# Altium PCB AIRtest.PcbDoc
Units mm, origin at the board's own origin, x right, y up, seen from the top; angles counter-clockwise.
Board outline 53.34 x 33.02 mm, 2 copper layers (Top Layer, Bottom Layer); 42 components, 56 nets, 120 pads, 0 vias.
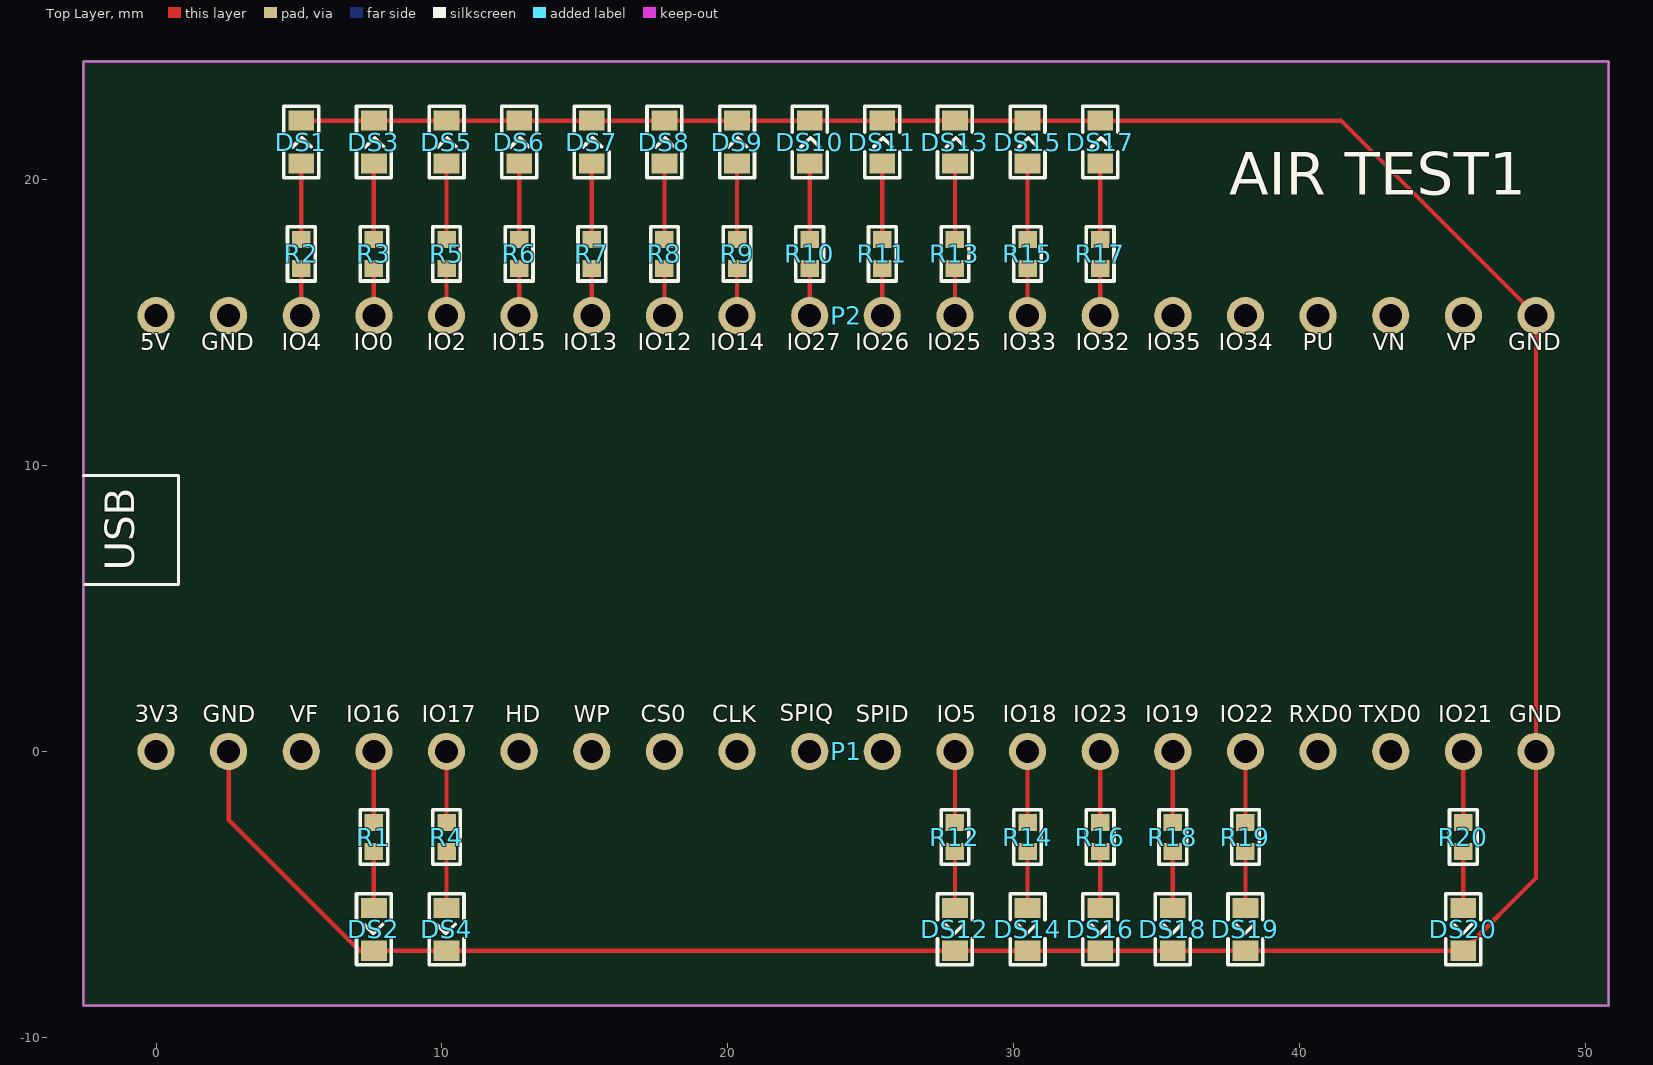
[diagram p0: Top Layer view]
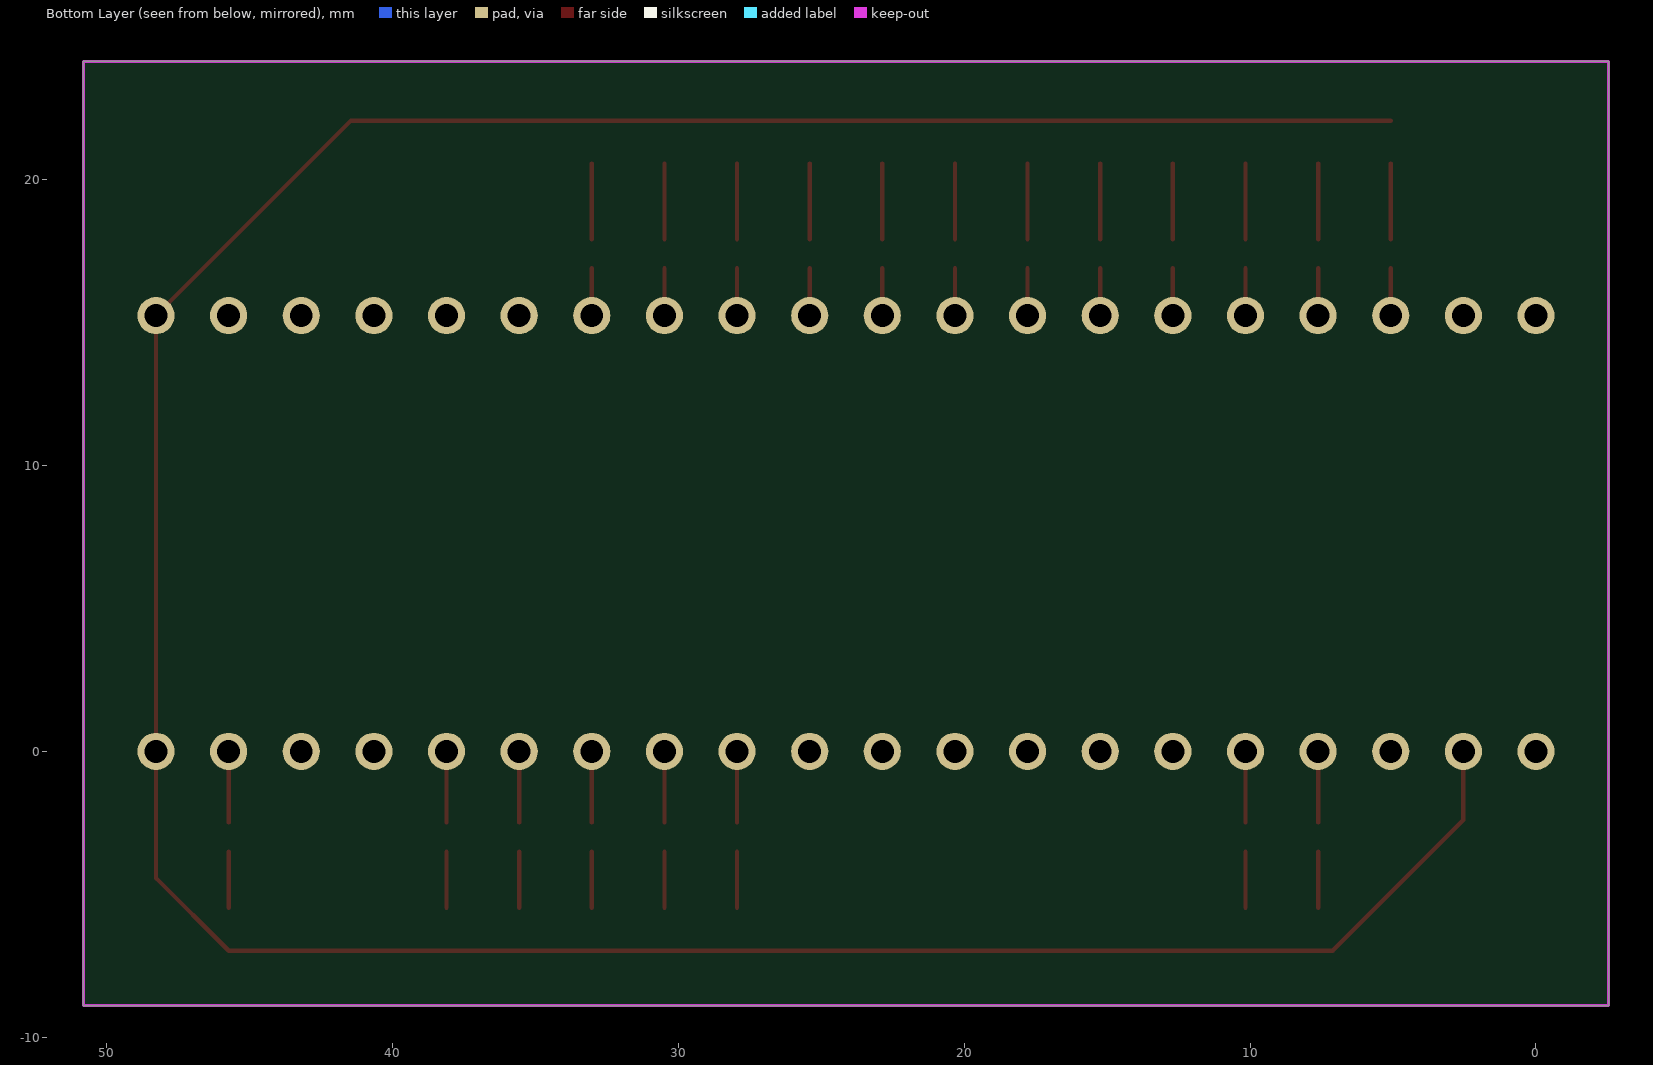
[diagram p1: Bottom Layer view, seen from below]

## Layer stack, top to bottom
Top Layer: signal copper 0.0356
Dielectric: dielectric 0.32, FR-4, Dk 4.8
Bottom Layer: signal copper 0.0356

## Board outline
-2.54,-8.89 50.8,-8.89 50.8,24.13 -2.54,24.13

## Design rules (kind name [scope] priority, off if disabled: settings)
Clearance Clearance_1 [InPolygon] p1: gap=0.127
Clearance [All] p2: gap=0.127
ComponentClearance [All] p1 off: gap=0.254 collisioncheckmode=3 verticalgap=0.254 showdistances=FALSE
Height [All] p1 off: minheight=0 maxheight=25.4 prefheight=12.7
HoleToHoleClearance [All] p1: gap=0.152 allowstackedmicrovias=TRUE
MinimumSolderMaskSliver [All] p1: minsoldermaskwidth=0.025
NetAntennae [All] p1: netantennaetolerance=0.102
PlaneConnect [All] p1: planeconnectstyle=Direct reliefexpansion=0.508 reliefentries=4 reliefconductorwidth=0.254 reliefairgap=0.254
PolygonConnect [All] p1: connectstyle=Direct reliefconductorwidth=0.254 reliefentries=4 polygonreliefangle="90 Angle"
RoutingVias [All] p1: holewidth=0.203 width=0.406 viastyle="Through Hole" minholewidth=0.203 minwidth=0.406 maxholewidth=0.711 maxwidth=1.27
SilkToSilkClearance [All] p1: silktosilkclearance=0
SilkscreenOverComponentPads [All] p1: minsilkscreentomaskgap=0
SolderMaskExpansion [All] p1: expansion=0.102
TestPointUsage [All] p1 off: valid=0 allowmultiple=FALSE
Testpoint [All] p1 off: side=15 testpointundercomponent=TRUE minsize=1.016 maxsize=2.54 preferedsize=1.524 minholesize=0 maxholesize=1.016 preferedholesize=0.813 testpointgrid=0.025 style=1023 order=0-112345678
Width [All] p1: maxlimit=0.762 minlimit=0.127 preferedwidth=0.152
16 further rules are at their usual default settings.

## Components (designator, comment, footprint, x,y, rotation, side; value= is the part's Value field where it differs from the comment)
DS1 "BLUE" LED0603 5.08,21.311 r90 top
DS2 "BLUE" LED0603 7.62,-6.223 r270 top
DS3 "BLUE" LED0603 7.62,21.311 r90 top
DS4 "BLUE" LED0603 10.16,-6.223 r270 top
DS5 "BLUE" LED0603 10.16,21.311 r90 top
DS6 "BLUE" LED0603 12.7,21.311 r90 top
DS7 "BLUE" LED0603 15.24,21.311 r90 top
DS8 "BLUE" LED0603 17.78,21.311 r90 top
DS9 "BLUE" LED0603 20.32,21.311 r90 top
DS10 "BLUE" LED0603 22.86,21.311 r90 top
DS11 "BLUE" LED0603 25.4,21.311 r90 top
DS12 "BLUE" LED0603 27.94,-6.223 r270 top
DS13 "BLUE" LED0603 27.94,21.311 r90 top
DS14 "BLUE" LED0603 30.48,-6.223 r270 top
DS15 "BLUE" LED0603 30.48,21.311 r90 top
DS16 "BLUE" LED0603 33.02,-6.223 r270 top
DS17 "BLUE" LED0603 33.02,21.311 r90 top
DS18 "BLUE" LED0603 35.56,-6.223 r270 top
DS19 "BLUE" LED0603 38.1,-6.223 r270 top
DS20 "BLUE" LED0603 45.72,-6.223 r270 top
P1 "Header 20" HDR1X20-M2 0,0 r0 top locked
P2 "Header 20" HDR1X20-M2 0,15.24 r0 top locked
R1 "5.1K" R0402 7.62,-2.997 r90 top
R2 "5.1K" R0402 5.08,17.399 r270 top
R3 "5.1K" R0402 7.62,17.399 r270 top
R4 "5.1K" R0402 10.16,-2.997 r90 top
R5 "5.1K" R0402 10.16,17.399 r270 top
R6 "5.1K" R0402 12.7,17.399 r270 top
R7 "5.1K" R0402 15.24,17.399 r270 top
R8 "5.1K" R0402 17.78,17.399 r270 top
R9 "5.1K" R0402 20.32,17.399 r270 top
R10 "5.1K" R0402 22.86,17.399 r270 top
R11 "5.1K" R0402 25.4,17.399 r270 top
R12 "5.1K" R0402 27.94,-2.997 r90 top
R13 "5.1K" R0402 27.94,17.399 r270 top
R14 "5.1K" R0402 30.48,-2.997 r90 top
R15 "5.1K" R0402 30.48,17.399 r270 top
R16 "5.1K" R0402 33.02,-2.997 r90 top
R17 "5.1K" R0402 33.02,17.399 r270 top
R18 "5.1K" R0402 35.56,-2.997 r90 top
R19 "5.1K" R0402 38.1,-2.997 r90 top
R20 "5.1K" R0402 45.72,-2.997 r90 top

## Footprints (in the part's own frame and the unit in brackets; to place one, negate y for a bottom-side part, rotate by r counter-clockwise, add the part's x,y. Pads: shape width x height; smd on the part's side, far side on the other; paste and mask are expansions set on the pad)
HDR1X20-M2 [mm]
  round 1.3 hole 0.8: 1(0,0) 2(2.54,0) 3(5.08,0) 4(7.62,0) 5(10.16,0) 6(12.7,0) 7(15.24,0) 8(17.78,0) 9(20.32,0) 10(22.86,0) 11(25.4,0) 12(27.94,0) 13(30.48,0) 14(33.02,0) 15(35.56,0) 16(38.1,0) 17(40.64,0) 18(43.18,0) 19(45.72,0) 20(48.26,0)
LED0603 [mm]
  rect 0.7x0.9 smd: A(-0.75,0) K(0.75,0)
  silkscreen extent -1.24,-0.61 1.24,0.61
R0402 [mm]
  rect 0.6x0.65 smd: 1(-0.508,0) 2(0.508,0)
  silkscreen extent -0.95,-0.48 0.95,0.48, body extent -0.47,-0.25 0.53,0.25, height 0.35

## Part data
DS1 DS2 DS3 DS4 DS5 DS6 DS7 DS8 DS9 DS10 DS11 DS12 DS13 DS14 DS15 DS16 DS17 DS18 DS19 DS20: library part LED, "LED"
P1 P2: "Header, 20-Pin"
R1 R2 R3 R4 R5 R6 R7 R8 R9 R10 R11 R12 R13 R14 R15 R16 R17 R18 R19 R20: library part RES, "普通电阻"

## Nets (pads, with @x,y where several pads share a name; then routed paths per layer and width w, separated by ;. In a path a pad name is that pad's centre, name@x,y a point inside that pad or via, vN(x,y) a via of type N, cw(c..) or ccw(c..) an arc to the next point about the centre after c; other vN are vias at no path point)
5V: P2.1
CHIP_PU: P2.17
GND: DS1.K DS2.K DS3.K DS4.K DS5.K DS6.K DS7.K DS8.K DS9.K DS10.K DS11.K DS12.K DS13.K DS14.K DS15.K DS16.K DS17.K DS18.K DS19.K DS20.K P1.2 P1.20 P2.20 | length 116.7
  Top Layer w0.152: P1.2 2.54,-2.401 7.112,-6.973 DS2.K DS4.K DS12.K DS14.K DS16.K DS18.K DS19.K DS20.K 48.26,-4.433 P1.20 P2.20 41.439,22.061 DS17.K DS15.K DS13.K DS11.K DS10.K DS9.K DS8.K DS7.K DS6.K DS5.K DS3.K DS1.K
GPI34: P2.16
GPI35: P2.15
GPIO0/DL: P2.4 R3.2 | length 1.7
  Top Layer w0.152: P2.4 R3.2
GPIO2: P2.5 R5.2 | length 1.7
  Top Layer w0.152: P2.5 R5.2
GPIO4: P2.3 R2.2 | length 1.7
  Top Layer w0.152: P2.3 R2.2
GPIO5: P1.12 R12.2 | length 2.5
  Top Layer w0.152: R12.2 P1.12
GPIO12: P2.8 R8.2 | length 1.7
  Top Layer w0.152: P2.8 R8.2
GPIO13: P2.7 R7.2 | length 1.7
  Top Layer w0.152: P2.7 R7.2
GPIO14: P2.9 R9.2 | length 1.7
  Top Layer w0.152: P2.9 R9.2
GPIO15: P2.6 R6.2 | length 1.7
  Top Layer w0.152: P2.6 R6.2
GPIO16: P1.4 R1.2 | length 2.5
  Top Layer w0.152: R1.2 P1.4
GPIO17: P1.5 R4.2 | length 2.5
  Top Layer w0.152: R4.2 P1.5
GPIO18: P1.13 R14.2 | length 2.5
  Top Layer w0.152: R14.2 P1.13
GPIO19: P1.15 R18.2 | length 2.5
  Top Layer w0.152: R18.2 P1.15
GPIO21: P1.19 R20.2 | length 2.5
  Top Layer w0.152: R20.2 P1.19
GPIO22: P1.16 R19.2 | length 2.5
  Top Layer w0.152: R19.2 P1.16
GPIO23: P1.14 R16.2 | length 2.5
  Top Layer w0.152: R16.2 P1.14
GPIO25: P2.12 R13.2 | length 1.7
  Top Layer w0.152: P2.12 R13.2
GPIO26: P2.11 R11.2 | length 1.7
  Top Layer w0.152: P2.11 R11.2
GPIO27: P2.10 R10.2 | length 1.7
  Top Layer w0.152: P2.10 R10.2
GPIO32: P2.14 R17.2 | length 1.7
  Top Layer w0.152: P2.14 R17.2
GPIO33: P2.13 R15.2 | length 1.7
  Top Layer w0.152: P2.13 R15.2
NetDS1_A: DS1.A R2.1 | length 2.7
  Top Layer w0.152: R2.1 DS1.A
NetDS2_A: DS2.A R1.1 | length 2
  Top Layer w0.152: DS2.A R1.1
NetDS3_A: DS3.A R3.1 | length 2.7
  Top Layer w0.152: R3.1 DS3.A
NetDS4_A: DS4.A R4.1 | length 2
  Top Layer w0.152: DS4.A R4.1
NetDS5_A: DS5.A R5.1 | length 2.7
  Top Layer w0.152: R5.1 DS5.A
NetDS6_A: DS6.A R6.1 | length 2.7
  Top Layer w0.152: R6.1 DS6.A
NetDS7_A: DS7.A R7.1 | length 2.7
  Top Layer w0.152: R7.1 DS7.A
NetDS8_A: DS8.A R8.1 | length 2.7
  Top Layer w0.152: R8.1 DS8.A
NetDS9_A: DS9.A R9.1 | length 2.7
  Top Layer w0.152: R9.1 DS9.A
NetDS10_A: DS10.A R10.1 | length 2.7
  Top Layer w0.152: R10.1 DS10.A
NetDS11_A: DS11.A R11.1 | length 2.7
  Top Layer w0.152: R11.1 DS11.A
NetDS12_A: DS12.A R12.1 | length 2
  Top Layer w0.152: DS12.A R12.1
NetDS13_A: DS13.A R13.1 | length 2.7
  Top Layer w0.152: R13.1 DS13.A
NetDS14_A: DS14.A R14.1 | length 2
  Top Layer w0.152: DS14.A R14.1
NetDS15_A: DS15.A R15.1 | length 2.7
  Top Layer w0.152: R15.1 DS15.A
NetDS16_A: DS16.A R16.1 | length 2
  Top Layer w0.152: DS16.A R16.1
NetDS17_A: DS17.A R17.1 | length 2.7
  Top Layer w0.152: R17.1 DS17.A
NetDS18_A: DS18.A R18.1 | length 2
  Top Layer w0.152: DS18.A R18.1
NetDS19_A: DS19.A R19.1 | length 2
  Top Layer w0.152: DS19.A R19.1
NetDS20_A: DS20.A R20.1 | length 2
  Top Layer w0.152: DS20.A R20.1
RXD0: P1.17
SENS_VN: P2.18
SENS_VP: P2.19
SPICLK: P1.9
SPICS0: P1.8
SPID: P1.11
SPIHD: P1.6
SPIQ: P1.10
SPIWP: P1.7
TXD0: P1.18
VDD_FLASH: P1.3
pads on no net: P1.1 P2.2

## Keep-outs
Keep-Out Layer:
  the board outline again, w0.102

## Silkscreen, mask and mechanical layers (free items; w line width, h text height)
Top Overlay:
  lines w0.102: -2.54,9.652 0.787,9.652 0.787,5.842 -2.489,5.842
  text "AIR TEST1" at 37.541,18.974 h2.54
  text "5V" at -0.559,13.818 h1.02
  text "GND" at 1.575,13.812 h1.02
  text "IO4" at 4.394,13.812 h1.02
  text "IO0" at 6.909,13.812 h1.02
  text "IO2" at 9.474,13.812 h1.02
  text "IO15" at 11.735,13.812 h1.02
  text "IO13" at 14.249,13.812 h1.02
  text "IO12" at 16.84,13.812 h1.02
  text "IO14" at 19.38,13.812 h1.02
  text "IO27" at 22.052,13.812 h1.02
  text "IO26" at 24.46,13.812 h1.02
  text "IO25" at 26.975,13.812 h1.02
  text "IO33" at 29.591,13.812 h1.02
  text "IO32" at 32.156,13.812 h1.02
  text "IO35" at 34.646,13.812 h1.02
  text "IO34" at 37.16,13.812 h1.02
  text "PU" at 40.111,13.818 h1.02
  text "VN" at 42.545,13.812 h1.02
  text "VP" at 45.136,13.812 h1.02
  text "GND" at 47.295,13.812 h1.02
  text "USB" at -0.406,6.325 h1.78 r90
  text "SPIQ" at 21.816,0.84 h1.02
  text "3V3" at -0.737,0.817 h1.02
  text "GND" at 1.626,0.813 h1.02
  text "VF" at 4.675,0.812 h1.02
  text "IO16" at 6.655,0.813 h1.02
  text "IO17" at 9.296,0.813 h1.02
  text "HD" at 12.217,0.812 h1.02
  text "WP" at 14.605,0.812 h1.02
  text "CS0" at 16.958,0.813 h1.02
  text "CLK" at 19.456,0.812 h1.02
  text "SPID" at 24.464,0.813 h1.02
  text "IO5" at 27.305,0.813 h1.02
  text "IO18" at 29.616,0.813 h1.02
  text "IO23" at 32.084,0.813 h1.02
  text "IO19" at 34.599,0.813 h1.02
  text "IO22" at 37.208,0.813 h1.02
  text "RXD0" at 39.607,0.817 h1.02
  text "TXD0" at 42.085,0.817 h1.02
  text "IO21" at 44.834,0.813 h1.02
  text "GND" at 47.32,0.813 h1.02